# EAGLE board HW2_circuit (EAGLE 8.1.0)

Size 50 x 50 mm. Coordinates in mm from the lower left corner, seen from the top.
Outline: 0,0 50,0 50,50 0,50 0,0
Copper layers (1*16): Top 0.035mm / dielectric 1.5mm / Bottom 0.035mm
Design rules "default": minimum track width 10mil, minimum drill 24mil, track to track 8mil, track to pad 8mil, pad to pad 8mil, via to via 8mil, smd to smd 8mil, copper to edge 40mil, drill to drill 8mil, minimum pad ring 10mil, minimum via ring 8mil, stop-mask expansion 4mil, vias tented up to drill 0mil, thermal gap 10mil

## Footprints (pad centres in the part's own frame; a part is rotated, then mirrored left to right if it is on the bottom)
LED3MM = drill 0.813 octagon: A -1.27,0; K 1.27,0
B45181B = drill 0.813: + -2.54,0 | drill 0.813 octagon: - 2.54,0
C025-024X044 = drill 0.813 octagon: 1 -1.27,0; 2 1.27,0
MOLEX-1X6 = drill 1.016 pad 1.88: 1 0,0; 2 2.54,0; 3 5.08,0; 4 7.62,0; 5 10.16,0; 6 12.7,0
1X08 = drill 1.016 pad 1.88: 1 0,0; 2 2.54,0; 3 5.08,0; 4 7.62,0; 5 10.16,0; 6 12.7,0; 7 15.24,0; 8 17.78,0
0309/12 = drill 0.813 octagon: 1 -6.35,0; 2 6.35,0
DIL28-3 = drill 0.813 long: 1 -16.51,-3.81; 2 -13.97,-3.81; 3 -11.43,-3.81; 4 -8.89,-3.81; 5 -6.35,-3.81; 6 -3.81,-3.81; 7 -1.27,-3.81; 8 1.27,-3.81; 9 3.81,-3.81; 10 6.35,-3.81; 11 8.89,-3.81; 12 11.43,-3.81; 13 13.97,-3.81; 14 16.51,-3.81; 15 16.51,3.81; 16 13.97,3.81; 17 11.43,3.81; 18 8.89,3.81; 19 6.35,3.81; 20 3.81,3.81; 21 1.27,3.81; 22 -1.27,3.81; 23 -3.81,3.81; 24 -6.35,3.81; 25 -8.89,3.81; 26 -11.43,3.81; 27 -13.97,3.81; 28 -16.51,3.81
1X03 = drill 1.016 pad 1.88: 1 0,0; 2 2.54,0; 3 5.08,0
JST-5-PTH = drill 0.7 pad 1.6: 1 -4,0; 2 -2,0; 3 0,0; 4 2,0; 5 4,0
TO92 = drill 0.813 octagon: 1 -1.27,0; 2 0,1.905; 3 1.27,0
32005-601 = drill 0.7 pad 1.016: 1 2.825,1.6; 2 1.625,0.8; 3 2.825,0; 4 1.625,-0.8; 5 2.825,-1.6 | drill 1 pad 1.422 long: M1 -2.225,3.65; M2 -2.225,-3.65

## Placement (x,y rotation side)
BUTTON_LED  [LED3MM]  13.97,12.7 0 top
C1  10  [B45181B]  36.83,39.37 0 top
C2  10  [B45181B]  45.72,39.37 0 top
C3  0.1  [C025-024X044]  13.97,26.67 0 top
C4  0.1  [C025-024X044]  11.43,19.05 0 top
C5  0.1  [C025-024X044]  44.45,24.13 0 top
C6  0.1  [C025-024X044]  40.64,30.48 0 top
C7  0.1  [C025-024X044]  41.91,34.29 0 top
J1  PIC_ICSP_6_PIN  [MOLEX-1X6]  35.56,45.72 0 top
J2  [1X08]  2.54,19.05 90 top
J3  [1X08]  48.26,16.51 90 top
POWER_LED  [LED3MM]  17.78,2.54 0 top
R1  330  [0309/12]  25.4,43.18 0 top
R2  10k  [0309/12]  15.24,50.8 0 top
R3  330  [0309/12]  29.21,1.27 0 top
R4  10k  [0309/12]  13.97,41.91 0 top
U$1  PIC32MX250F128B  [DIL28-3]  26.67,22.86 270 top
U$2  RESONATOR  [1X03]  39.37,19.05 270 top
U$3  SLIDE_SWITCH  [JST-5-PTH]  43.18,2.54 0 top
U$4  MCP1702  [TO92]  12.7,36.83 0 top
U$5  BUTTON  [1X03]  2.54,16.51 270 top
U$6  BUTTON  [1X03]  2.54,44.45 270 top
X1  MINI-USB_SHIELD5P2-32005-601  [32005-601]  6.35,5.08 0 top

## Library data of the parts
BUTTON_LED C1-C7 POWER_LED R1-R4 U$1-U$6 = ME433
J1 = ME433; PROD_ID: CONN-08046; SF_ID: PRT-08094
J2 J3 = ME433; PROD_ID: CONN-08438
X1 = ME433; OC_FARNELL: unknown; OC_NEWARK: unknown

## Nets
+3V3: BUTTON_LED.A C1.+ C3.1 C5.1 C6.1 C7.1 J1.5 J2.2 POWER_LED.A R2.2 R4.2 U$1.13 U$1.23 U$1.28 U$4.3
+5V: C4.1 J3.2 U$1.15 U$3.3 U$4.2
A0: J2.8 U$1.2
A1: J2.7 U$1.3
A4: BUTTON_LED.K J2.3 R3.2 U$1.12
B2: J2.6 U$1.6
B3: J2.5 U$1.7
B4: J2.4 R4.1 U$1.11 U$5.1
B7: J3.3 U$1.16
B8: J3.4 U$1.17
B9: J3.5 U$1.18
B13: J3.6 U$1.24
B14: J3.7 U$1.25
B15: J3.8 U$1.26
D+: U$1.21 X1.3
D-: U$1.22 X1.2
GND: C1.- C2.- C3.2 C4.2 C5.2 C6.2 C7.2 J1.4 J2.1 J3.1 R1.1 R3.1 U$1.8 U$1.19 U$1.27 U$2.2 U$3.4 U$4.1 U$5.3 U$6.3 X1.5
MCLR: J1.6 R2.1 U$1.1 U$6.1
N$1: C2.+ U$1.20
N$3: POWER_LED.K R1.2
OSC1: U$1.9 U$2.3
OSC2: U$1.10 U$2.1
PGEC1: J1.2 U$1.5
PGED1: J1.3 U$1.4
USBID: U$1.14 X1.4
VBUS: U$3.2 X1.1

## Tracks (layer width: path | path; a pad name or v marks a point on that pad's centre or on a via)
+3V3  (14 unrouted)
+5V  (4 unrouted)
A0  (1 unrouted)
A1  (1 unrouted)
A4  (3 unrouted)
B2  (1 unrouted)
B3  (1 unrouted)
B4  (3 unrouted)
B7  (1 unrouted)
B8  (1 unrouted)
B9  (1 unrouted)
B13  (1 unrouted)
B14  (1 unrouted)
B15  (1 unrouted)
D+  (1 unrouted)
D-  (1 unrouted)
GND  (20 unrouted)
MCLR  (3 unrouted)
N$1  (1 unrouted)
N$3  (1 unrouted)
OSC1  (1 unrouted)
OSC2  (1 unrouted)
PGEC1  (1 unrouted)
PGED1  (1 unrouted)
USBID  (1 unrouted)
VBUS  (1 unrouted)